# Altium PCB PCB ionode.PcbDoc
Units mm, origin at the board's own origin, x right, y up, seen from the top; angles counter-clockwise.
Board outline 39.37 x 55.75 mm, 2 copper layers (Top Layer, Bottom Layer); 13 components, 12 nets, 44 pads, 1 vias.
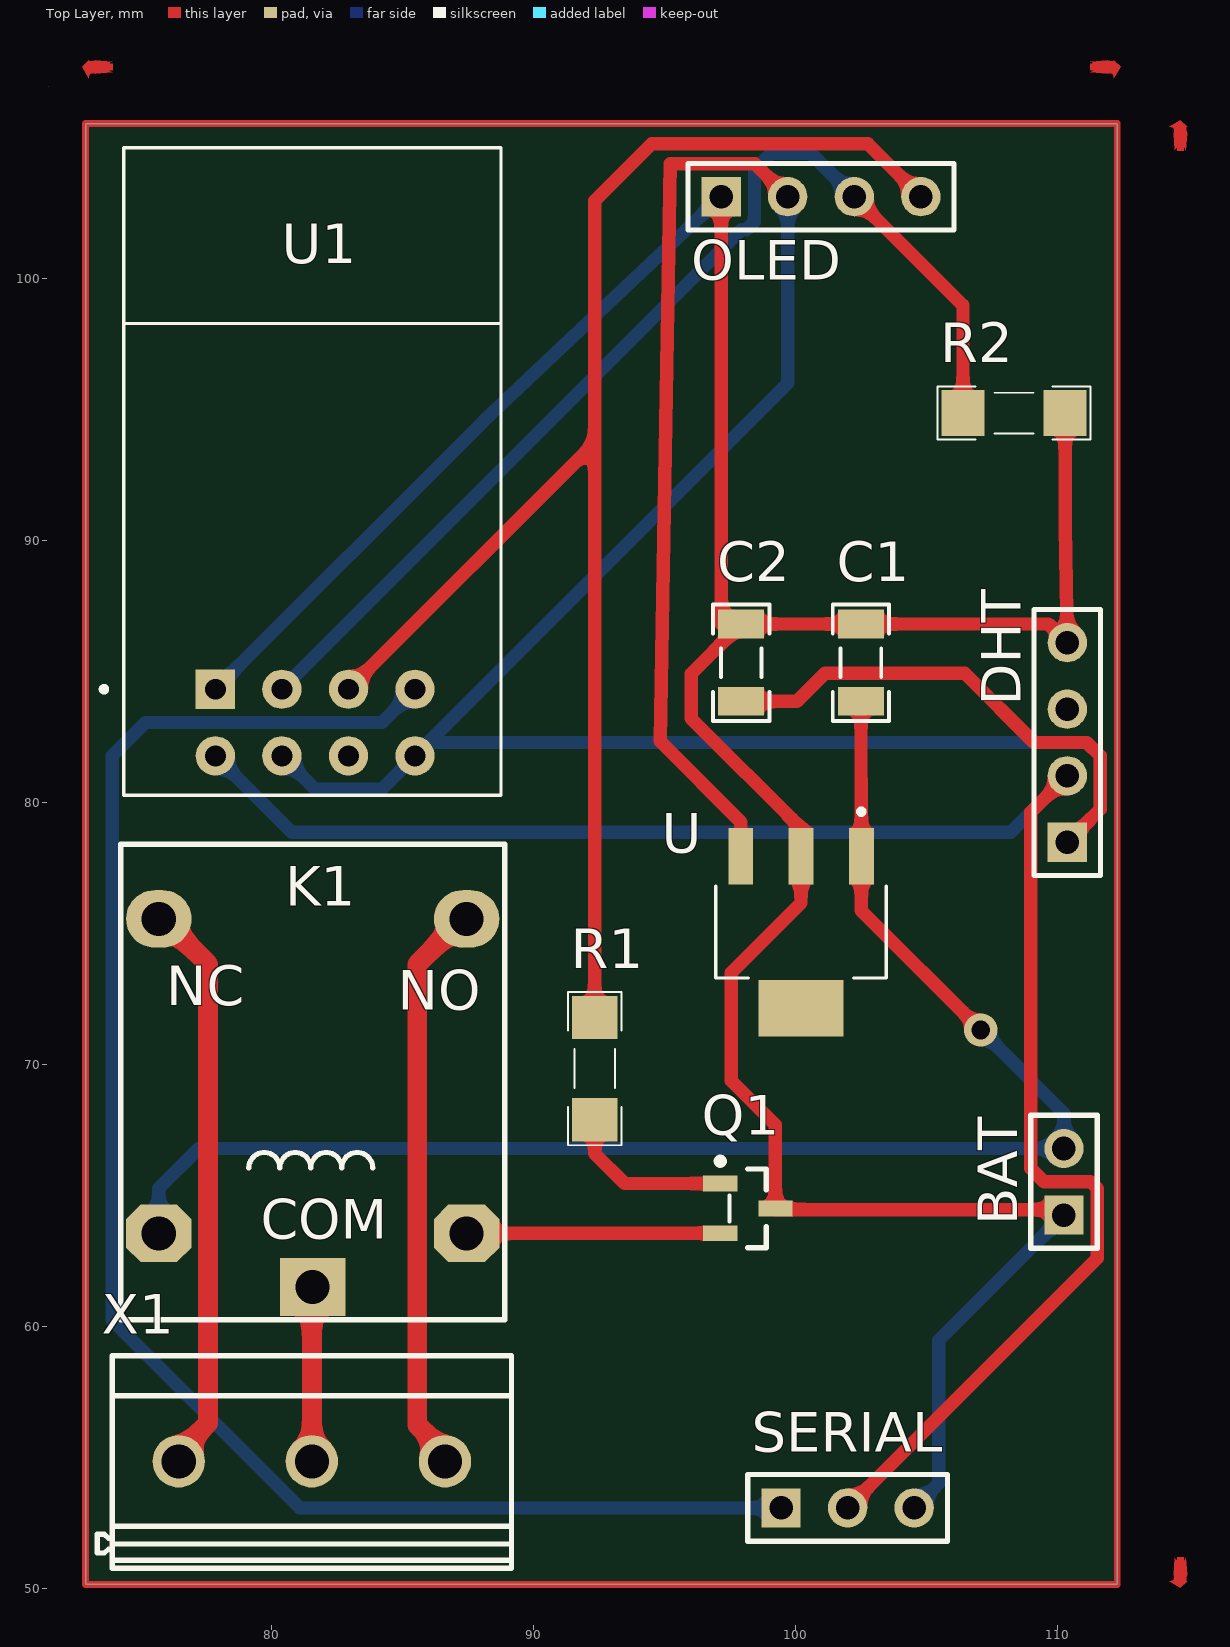
[diagram p0: Top Layer view]
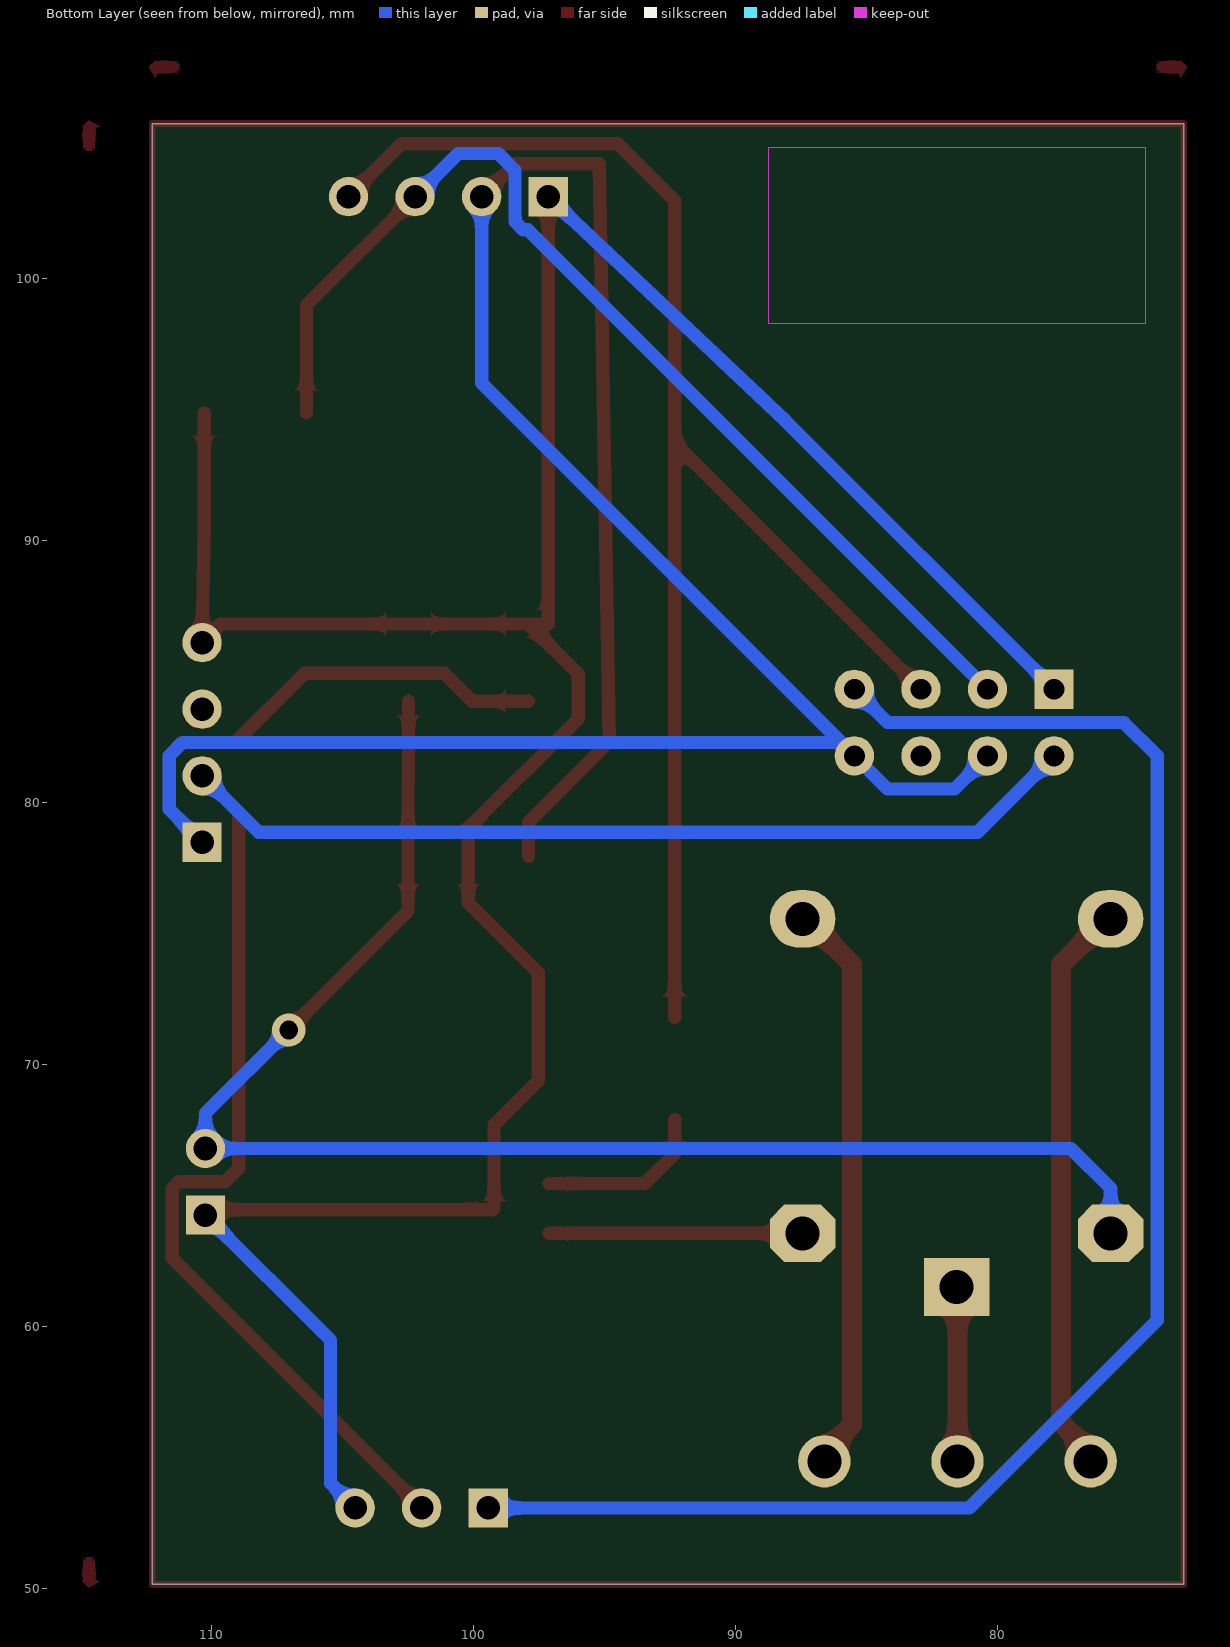
[diagram p1: Bottom Layer view, seen from below]
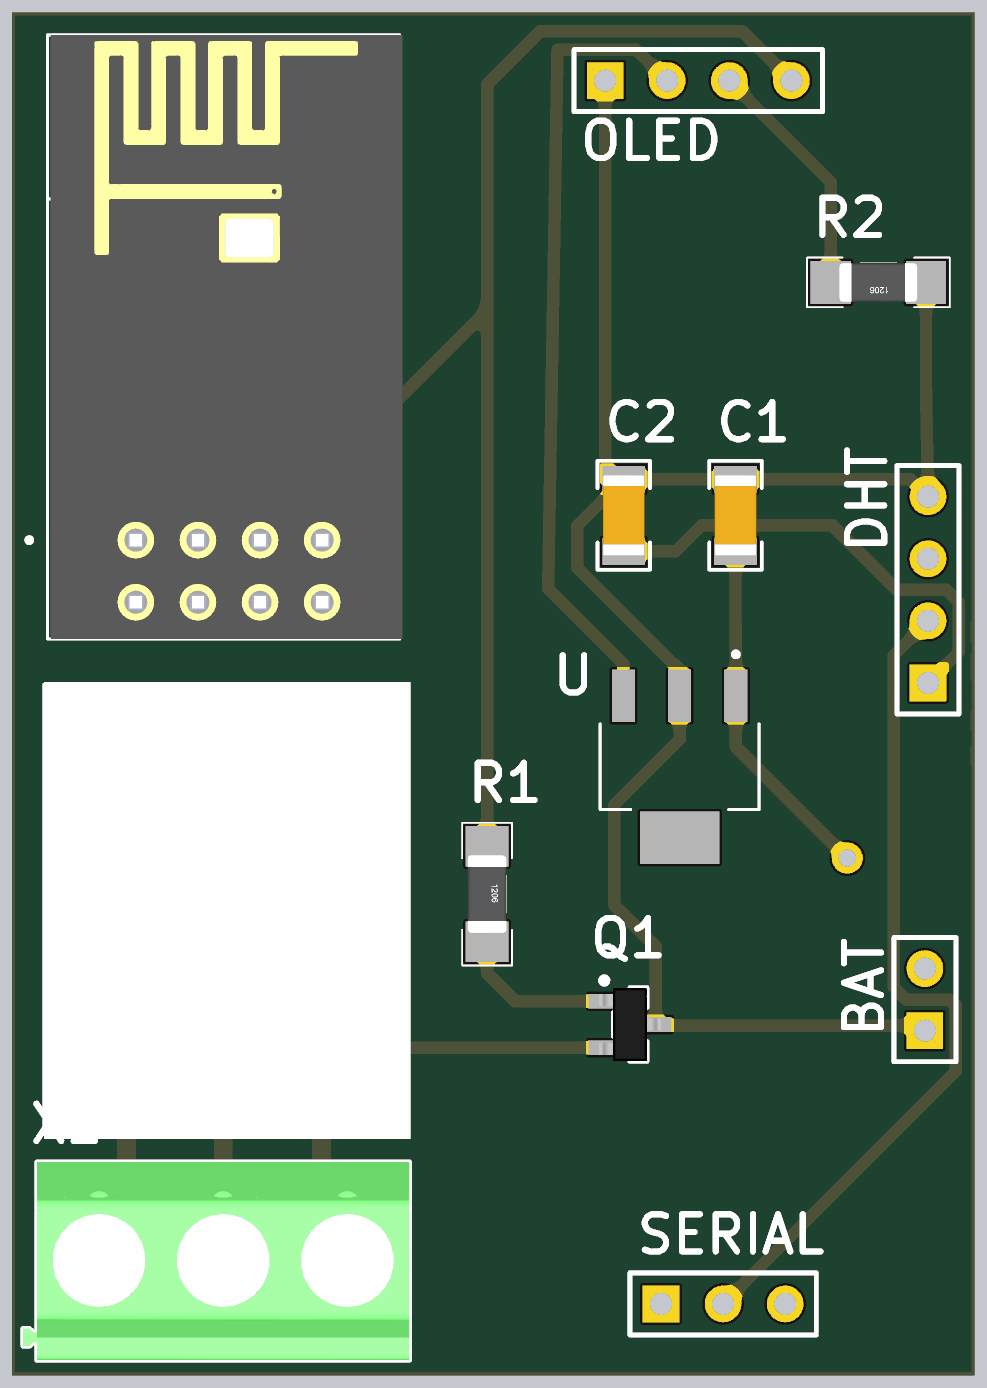
[diagram p2: 3D render of the assembled board from above, using the file's embedded part models]

## Layer stack, top to bottom
Top Solder: solder mask 0.0102, Solder Resist, Dk 3.5
Top Layer: signal copper 0.0356
Dielectric 1: dielectric 0.32, FR-4, Dk 4.8
Bottom Layer: signal copper 0.0356
Bottom Solder: solder mask 0.0102, Solder Resist, Dk 3.5

## Board outline
72.898,50.165 72.898,105.918 112.268,105.918 112.268,50.165
cut-out: 71.501,107.315

## Design rules (kind name [scope] priority, off if disabled: settings)
Clearance [All] p1: gap=0.254 ignorepadtopadclearanceinfootprint=FALSE except(0: Arc-Hole Track-Hole SMDPad-Hole THPad-Hole Via-Hole Fill-Hole Poly-Hole Region-Hole Text-Hole)
PolygonConnect [All] p1: connectstyle=Relief reliefconductorwidth=0.254 reliefentries=4 polygonreliefangle="90 Angle" airgapwidth=0.254
RoutingVias [All] p1: holewidth=0.711 width=1.27 viastyle="Through Hole" minholewidth=0.711 minwidth=1.27 maxholewidth=0.711 maxwidth=1.27
SolderMaskExpansion [All] p1: expansion=0.102
Width [All] p1: maxlimit=0.762 minlimit=0.254 preferedwidth=0.508 minimp=50.000000 maximp=50.000000 favimp=50.000000
30 further rules are at their usual default settings.

## Components (designator, comment, footprint, x,y, rotation, side; value= is the part's Value field where it differs from the comment)
BAT "Header 2" HDR1X2 110.236,64.262 r90 top (schematic designator BATTTERY)
C1 "100nF" CAP1206 102.489,85.344 r270 top
C2 "100nF" CAP1206 97.917,85.344 r270 top
DHT "Header 4" HDR1X4 110.363,78.486 r90 top
K1 "=value" "Relay 18.85x15.35x15.70" 81.567,68.54 r0 top
OLED "Header 4" HDR1X4 97.155,103.124 r0 top
Q1 "" SOT23_N 98.171,64.516 r0 top
R1 "1K" RESC4817X04N 92.329,69.85 r270 top
R2 "1K" RESC4817X04N 108.331,94.869 r180 top
SERIAL "Header 3" HDR1X3 99.441,53.086 r0 top
U "LM7805MP/NOPB" SOT230P700X180-4N 100.203,75.057 r270 top
U1 "ESP8266-01/ESP-01" XCVR_ESP8266-01/ESP-01 81.661,92.638 r0 top
X1 "CON_Phoenix_MKDSN_03" CON_MKDSN1,5/3-5,08 81.534,54.864 r0 top

## Footprints (in the part's own frame and the unit in brackets; to place one, negate y for a bottom-side part, rotate by r counter-clockwise, add the part's x,y. Pads: shape width x height; smd on the part's side, far side on the other; paste and mask are expansions set on the pad)
CAP1206 [mm] "Chip Capacitor, 2-Leads, Body 3/20x1/60mm, IPC Medium Density DESIGNER:ABBAS BASEREH"
  rect 1.1x1.75 smd: 1(-1.475,0) 2(1.475,0)
  silkscreen extent -2.22,-1.07 2.22,1.07, body extent -1.65,-0.85 1.65,0.85, height 0.94
CON_MKDSN1,5/3-5,08 [mm]
  round 2 hole 1.3: 1(-5.08,0) 2(0,0) 3(5.08,0)
  silkscreen extent -8.19,-4.07 7.62,4.03, body extent -8.19,-4.07 7.62,4.03, height 10.03
HDR1X2 [mm] "Connector; Header; 2 Position"
  rect 1.5x1.5 hole 0.9: 1(0,0)
  round 1.5 hole 0.9: 2(2.54,0)
  silkscreen extent -1.27,-1.27 3.81,1.27
HDR1X3 [mm] "Connector; Header; 3 Position"
  rect 1.5x1.5 hole 0.9: 1(0,0)
  round 1.5 hole 0.9: 2(2.54,0) 3(5.08,0)
  silkscreen extent -1.27,-1.27 6.35,1.27
HDR1X4 [mm] "Connector; Header; 4 Position"
  rect 1.5x1.5 hole 0.9: 1(0,0)
  round 1.5 hole 0.9: 2(2.54,0) 3(5.08,0) 4(7.62,0)
  silkscreen extent -1.27,-1.27 8.89,1.27
"Relay 18.85x15.35x15.70" [mm]
  rect 2.5x2.2 hole 1.3: 1(0,-7.025)
  oval 2.5x2.2 hole 1.3: 2(-5.875,7.025) 3(5.875,7.025)
  oct 2.5x2.2 hole 1.3: 4(-5.875,-4.975) 5(5.875,-4.975)
  silkscreen extent -7.32,-8.27 7.33,9.87, body extent -7.37,-8.71 7.63,9.98, height 15.7
RESC4817X04N [mm] "Chip Resistor, 2-Leads, Body 4/80x1/70mm, IPC Medium Density-Design:Abbas Basereh"
  rect 1.65x1.75 smd: 1(-1.95,0) 2(1.95,0)
  silkscreen extent -2.92,-1.02 2.92,1.02, body extent -1.6,-0.8 1.6,0.8, height 1
SOT23_N [mm] "SOT23, 3-Leads, Body 2.9x1.3mm, Pitch 0.95mm, Lead Span 2.3mm, IPC Medium Density"
  rect 1.3x0.6 smd: 1(-1.05,0.95) 2(-1.05,-0.95) 3(1.05,0)
  silkscreen extent -1.17,-1.5 0.7,1.92, body extent -1.27,-1.5 1.27,1.5, height 1.1
SOT230P700X180-4N [mm]
  rect 2.15x0.95 smd: 1(-2.9,2.3) 2(-2.9,0) 3(-2.9,-2.3)
  rect 2.15x3.25 smd: 4(2.9,0)
  silkscreen extent -4.7,-3.25 1.75,3.25
XCVR_ESP8266-01/ESP-01 [mm]
  rect 1.5x1.5 hole 0.8: 1(-3.81,-8.31)
  round 1.5 hole 0.8: 2(-1.27,-8.31) 3(1.27,-8.31) 4(3.81,-8.31) 5(-3.81,-10.85) 6(-1.27,-10.85) 7(1.27,-10.85) 8(3.81,-10.85)
  Keep-Out Layer region: 7.09,5.65 -7.31,5.65 -7.31,12.35 7.09,12.35
  Keep-Out Layer region: 7.09,5.65 -7.31,5.65 -7.31,12.35 7.09,12.35
  silkscreen extent -8.16,-12.35 7.09,12.35, body extent -7.2,-12.35 7.2,12.35, height 6.5

## Part data
BAT: "Header, 2-Pin", LatestRevisionDate=17-Jul-2002, LatestRevisionNote="Re-released for DXP Platform.", Publisher="Altium Limited"
C1 C2: library part "CAP SMD PACKAGE", "TOTAL CAPACITOR SMD PACK", Data=2017-3-10, Desc.="CAP SMD TOTAL PACKAGES", Designer="Abbas Basereh"
DHT OLED: "Header, 4-Pin", LatestRevisionDate=17-Jul-2002, LatestRevisionNote="Re-released for DXP Platform.", Publisher="Altium Limited"
K1: library part RELAY_SPDT, "Single-Pole Dual-Throw Relay", ComponentLink1Description=Datasheet, Designer="Abbas Basereh", Mounting Technology=Through-Hole, Pin Count=0, Update Date=2017-3-1
Q1: library part 2N3904, "NPN General Purpose Amplifier", ComponentLink1Description="Manufacturer Link", ComponentLink1URL=http://www.fairchildsemi.com/, ComponentLink2Description=Datasheet, ComponentLink2URL=http://www.fairchildsemi.com/ds/2N%2F2N3904.pdf, DatasheetVersion=1997, LatestRevisionDate=15-Jan-2003, LatestRevisionNote="PCB Footprint 'BCY-W3/D4.7' replaced", PackageDescription="TO, Flat Index; 3 In-Line, Axial Leads; Body Dia. 4.5mm; Leads 0.51 x 0.48 mm (max)", PackageReference=TO-92A, PackageVersion=Sep-1998, Published=8-Jun-2000, Publisher="Altium Limited"
R1 R2: library part "RES 1206 0.25W", "RES 1206", Data=16-12-2016, Desc.="RES SMD 1206", Designer="Abbas Basereh"
SERIAL: "Header, 3-Pin", LatestRevisionDate=17-Jul-2002, LatestRevisionNote="Re-released for DXP Platform.", Publisher="Altium Limited"
U: "1.5-A, Wide VIN Fixed Voltage Regulators", Package="SOT-223-4 Texas Instruments", Availability=Unavailable, MF="Texas Instruments", MP=LM7805MP/NOPB, Price=None, SnapEDA_Link=https://www.snapeda.com/parts/LM7805MP/NOPB/Texas%20Instruments/view-part/545076/?ref=snap, Texas_Instruments-Purchase-URL=https://snapeda.com/shop?store=Texas+Instruments&id=545076
U1: "MakerFocus 4pcs ESP8266 ESP-01 Serial Wireless WiFi Transceiver Receiver Module 1MB SPI Flash DC3.0-3.6V Internet of Things WiFi Module Board Compatible with Ar duino", Package="Non-Standard AI-Thinker", Availability="Not in stock", Check_prices=https://www.snapeda.com/parts/ESP8266-01/ESP-01/AI-Thinker/view-part/?ref=eda, MF=AI-Thinker, MP=ESP8266-01/ESP-01, Price=None, SnapEDA_Link=https://www.snapeda.com/parts/ESP8266-01/ESP-01/AI-Thinker/view-part/?ref=snap
X1: Manufacturer="PHOENIX CONTACT", Max Current="13.5 A", Voltage="400 V", Category=Connector, Company="SJ Libraries", ComponentLink1Description=Datasheet, ComponentLink2Description=Reference, Connector type="PCB Terminal Block", Designer="Eng. Saeid Jorablo", HelpURL=http://s3.picofile.com/file/7443264187/Coming_Soon_logo.gif, Mounting Technology=Through-Hole, Pin Count=3, Positions=3, Publisher="SJ UnLimited", Revision 1="2012/10/1 : Adding Model", Status=Unreleased, Update=2012/10/1

## Via types
v1: diameter 1.27, hole 0.711, Top Layer to Bottom Layer, 1 vias

## Nets (pads, with @x,y where several pads share a name; then routed paths per layer and width w, separated by ;. In a path a pad name is that pad's centre, name@x,y a point inside that pad or via, vN(x,y) a via of type N, cw(c..) or ccw(c..) an arc to the next point about the centre after c; other vN are vias at no path point)
3v3: C2.2 DHT.1 OLED.2 U1.6 U1.8 U.3 | length 115
  Top Layer w0.508: U.3 97.903,79.262 94.826,82.339 95.207,104.382 98.437,104.382 OLED.2 ; C2.2 100.049,83.869 101.117,84.938 106.451,84.938 109.093,82.296 111.113,82.296 111.621,81.788 111.621,79.744 DHT.1
  Bottom Layer w0.508: U1.6 81.661,80.518 84.201,80.518 U1.8 U1.8@85.979,82.296 ; OLED.2 99.695,96.012 U1.8@85.979,82.296 ; DHT.1 111.621,79.744 111.621,81.788 111.113,82.296 U1.8@85.979,82.296
GND: BAT.1 C1.1 C2.1 DHT.4 OLED.1 Q1.3 R2.1 SERIAL.3 U1.1 U.2 | length 116.8
  Top Layer w0.508: OLED.1 97.155,86.819 C2.1 ; BAT.1 110.028,64.47 99.267,64.47 Q1.3 99.221,67.708 97.536,69.393 97.536,73.508 100.203,76.175 U.2 100.203,79.019 96.012,83.21 96.012,84.914 C2.1 ; R2.1 110.281,90.557 DHT.4 109.65,86.819 C1.1 C2.1
  Bottom Layer w0.508: U1.1 88.087,94.564 OLED.1 ; SERIAL.3 105.461,54.026 105.461,59.487 BAT.1
GPIO0: OLED.4 R1.1 U1.3 | length 58.6
  Top Layer w0.508: U1.3 92.329,93.726 ; R1.1 92.329,93.726 ; OLED.4 102.755,105.144 94.505,105.144 92.329,102.968 92.329,93.726
GPIO2: OLED.3 R2.2 U1.2 | length 42.1
  Top Layer w0.508: OLED.3 106.381,98.978 R2.2
  Bottom Layer w0.508: U1.2 97.929,101.866 98.115,101.866 98.413,102.164 98.413,102.35 98.425,102.362 98.425,104.14 99.06,104.775 100.584,104.775 OLED.3
NetK1_1: K1.1 X1.2 | length 6.7
  Top Layer w0.762: X1.2 81.534,61.482 K1.1
NetK1_2: K1.2 X1.1 | length 22
  Top Layer w0.762: K1.2 75.842,75.565 77.577,73.83 77.577,56.322 76.454,55.199 X1.1
NetK1_3: K1.3 X1.3 | length 22
  Top Layer w0.762: X1.3 86.614,55.199 85.557,56.256 85.557,73.83 87.292,75.565 K1.3
NetK1_5: K1.5 Q1.2 | length 9.7
  Top Layer w0.508: K1.5 92.278,63.565 92.279,63.566 Q1.2
NetQ1_1: Q1.1 R1.2 | length 6.6
  Top Layer w0.508: R1.2 92.329,66.609 93.472,65.466 Q1.1
RX: SERIAL.1 U1.4 | length 62.6
  Bottom Layer w0.508: U1.4 84.201,83.058 75.184,83.058 73.914,81.788 73.914,60.249 81.077,53.086 SERIAL.1
TX: DHT.2 SERIAL.2 U1.5 | length 69.2
  Top Layer w0.508: SERIAL.2 111.506,62.611 111.506,65.278 111.252,65.532 109.474,65.532 108.966,66.04 108.966,79.629 DHT.2
  Bottom Layer w0.508: U1.5 80.772,78.867 108.204,78.867 DHT.2
Vin: BAT.2 C1.2 K1.4 U.1 | length 57.2
  Top Layer w0.508: C1.2 102.489,80.913 102.503,80.899 U.1 102.503,75.881 v1(107.061,71.323)
  Bottom Layer w0.508: K1.4 75.692,65.278 77.216,66.802 BAT.2 110.236,68.148 v1(107.061,71.323)
pads on no net: DHT.3 U1.7 U.4
copper on no net: | length 190.2
  Top Layer w0.254: 72.898,50.165 72.898,50.673 72.898,105.918 112.268,105.918 112.268,50.165 72.898,50.165

## Silkscreen, mask and mechanical layers (free items; w line width, h text height)
Mechanical 1:
  the board outline again, w0.5

## Dimensions
112.268,105.918 to 112.268,50.165 on Top Layer
72.898,105.918 to 112.268,105.918 on Top Layer

## Text inside footprints (layer, text, board x,y; h text height)
K1: Top Overlay "COM" at 79.586,63.358 h1.5; Top Overlay "NO" at 84.818,72.096 h1.5; Top Overlay "NC" at 75.979,72.274 h1.5